# EAGLE board transceiver (2) - Copy - Copy (EAGLE 6.4)
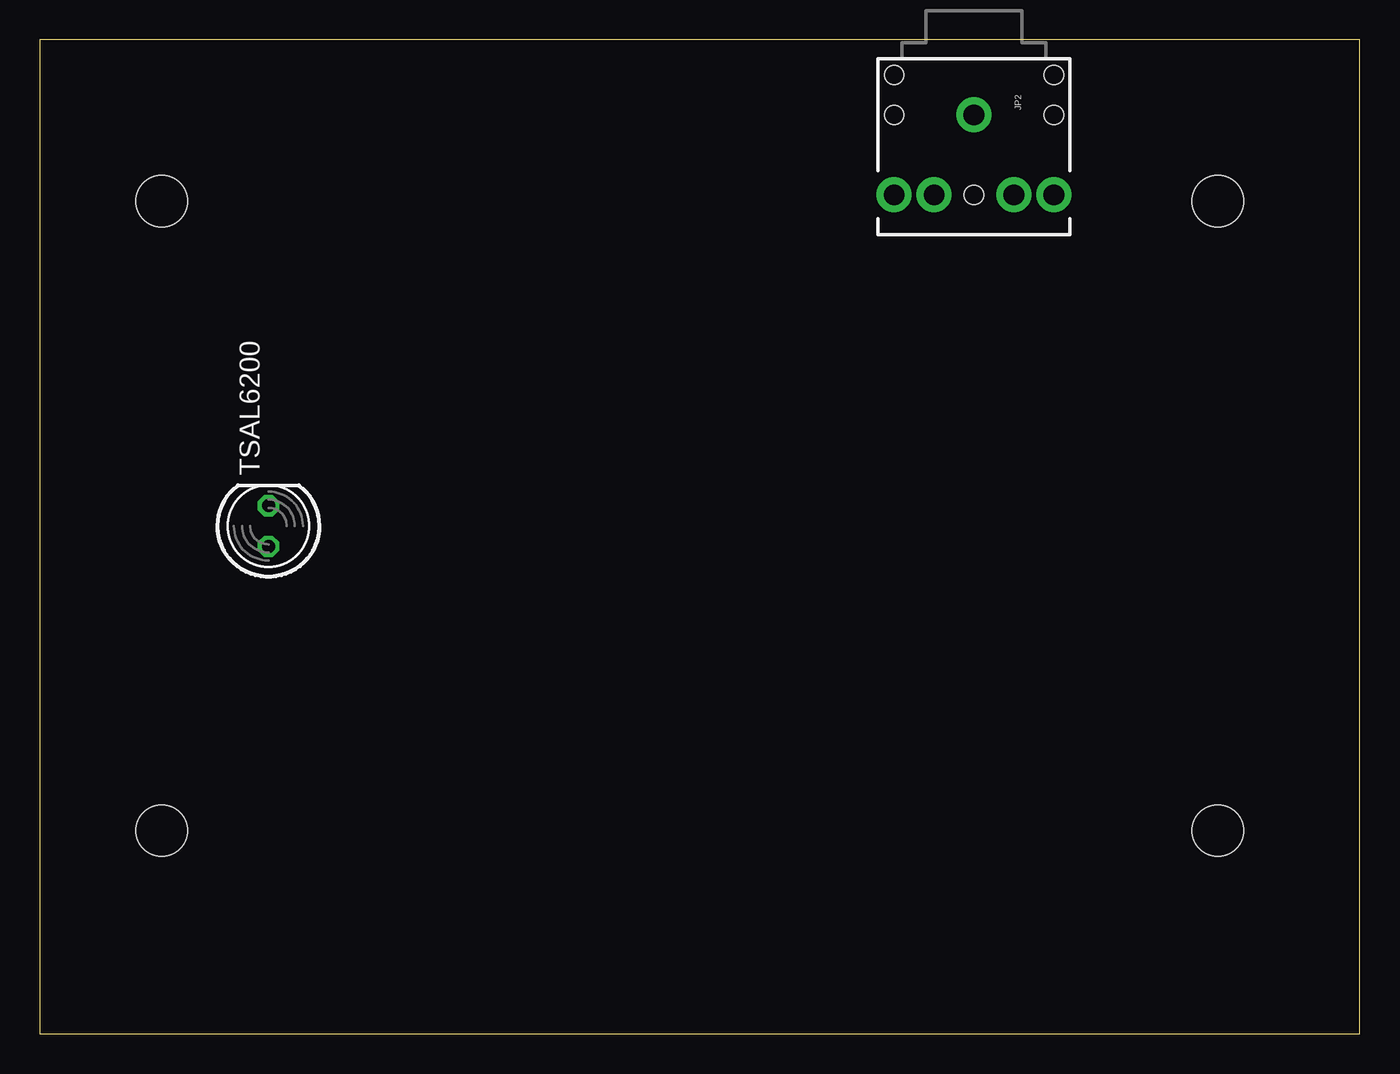
[diagram p0: board, top side]
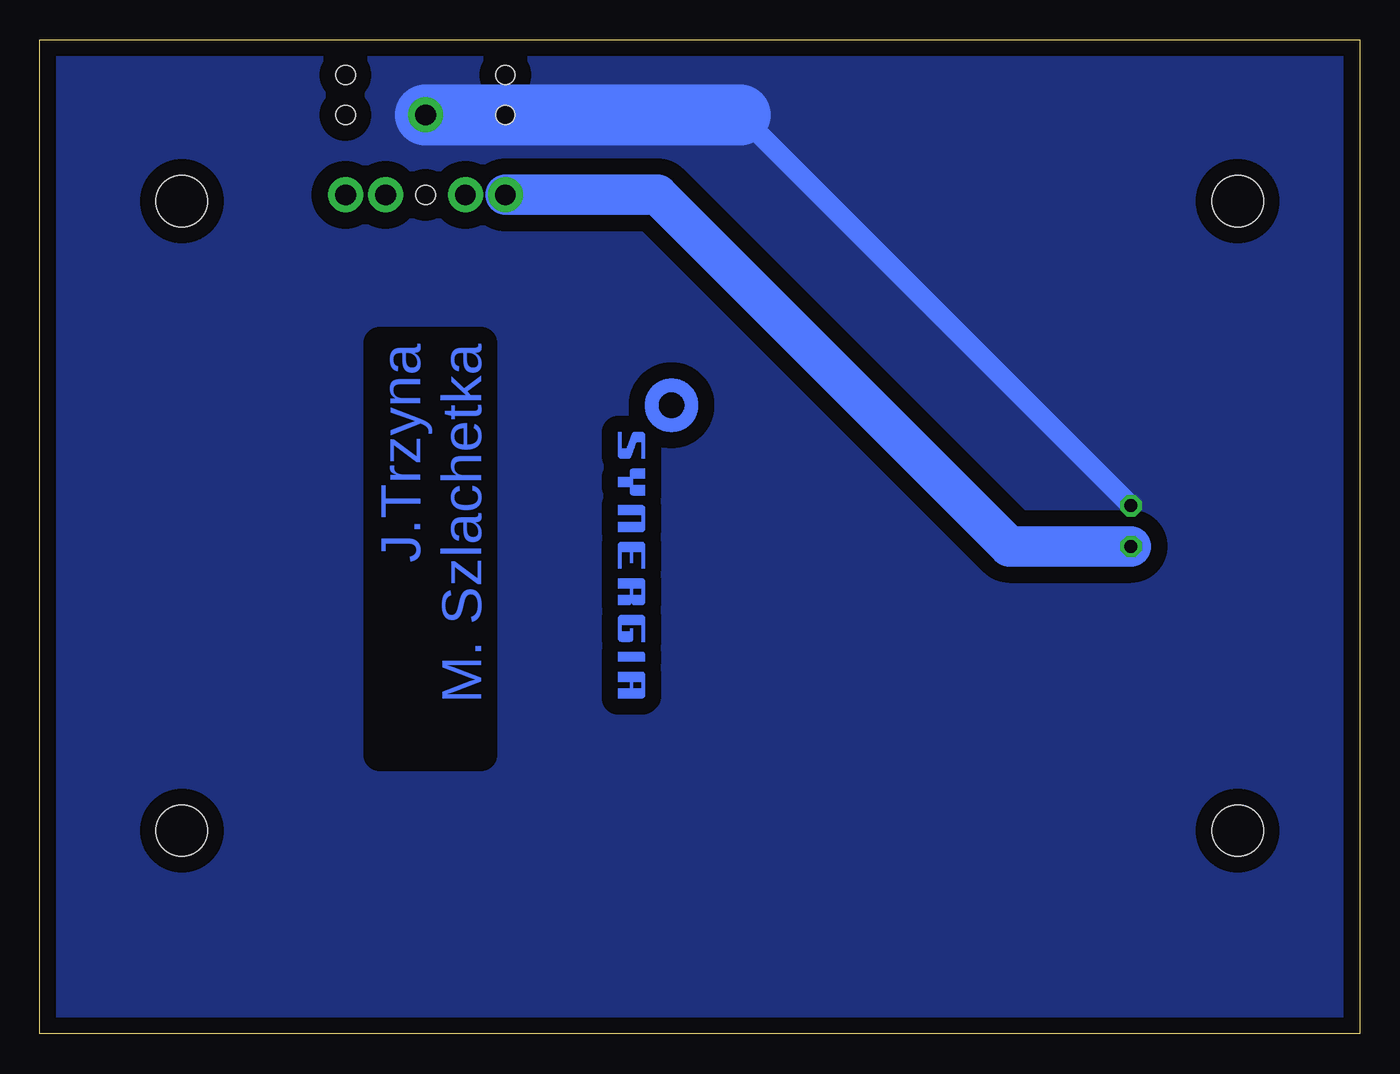
[diagram p1: board, bottom side, seen from below]

Size 82.53 x 62.15 mm. Coordinates in mm from the lower left corner, seen from the top.
Outline: 0,0 82.53,0 82.53,62.15 0,62.15 0,0
Copper layers (1*16): Top 0.035mm / dielectric 1.5mm / Bottom 0.035mm
Design rules "default": minimum track width 10mil, minimum drill 24mil, track to track 8mil, track to pad 8mil, pad to pad 8mil, via to via 8mil, smd to smd 8mil, copper to edge 40mil, drill to drill 8mil, minimum pad ring 10mil, minimum via ring 8mil, stop-mask expansion 4mil, vias tented up to drill 0mil, thermal gap 10mil
Holes 3.2 mm at 7.62,52.07 7.62,12.7 73.66,12.7 73.66,52.07

## Footprints (pad centres in the part's own frame; a part is rotated, then mirrored left to right if it is on the bottom)
AUDIO-JACK = drill 1.3 pad 2.184: RING 5,5; RSH 5,2.5; SLEEVE 0,0; TIP 5,-5; TSH 5,-2.5 | hole 1.2: 0,5; -2.5,5; -2.5,-5; 0,-5; 5,0
LED5MM = drill 0.813 octagon: A -1.27,0; K 1.27,0

## Placement (x,y rotation side)
E$2  [SYNERGIA_20MM]  46.35,40.96 270 bottom
JP2  [AUDIO-JACK]  58.42,57.47 270 top
TSAL6200  [LED5MM]  14.29,31.75 90 top

## Library data of the parts
E$2 = synergia_logo
JP2 = SparkFun-Connectors
TSAL6200 = led

## Nets
N$3: JP2.TIP TSAL6200.A
N$22: JP2.SLEEVE TSAL6200.K

## Tracks (layer width: path | path; a pad name or v marks a point on that pad's centre or on a via)
N$3
  Bottom 2.54: JP2.TIP 43.9,52.47 21.91,30.48 TSAL6200.A
N$22
  Bottom 1.27: 38.73,57.47 TSAL6200.K
  Bottom 3.81: JP2.SLEEVE 38.73,57.47
  pour Bottom (isolate 1.016, no thermals): 82.55,62.87 82.55,0 -0.64,0 -1.27,63.82

## Text on the board
Bottom: J.Trzyna / M. Szlachetka